# Altium PCB PCB_Raspi_4B.PcbDoc
Units mm, origin at the board's own origin, x right, y up, seen from the top; angles counter-clockwise.
Board outline 37.85 x 84.84 mm, 2 copper layers (Top Layer, Bottom Layer); 19 components, 21 nets, 94 pads, 21 vias.
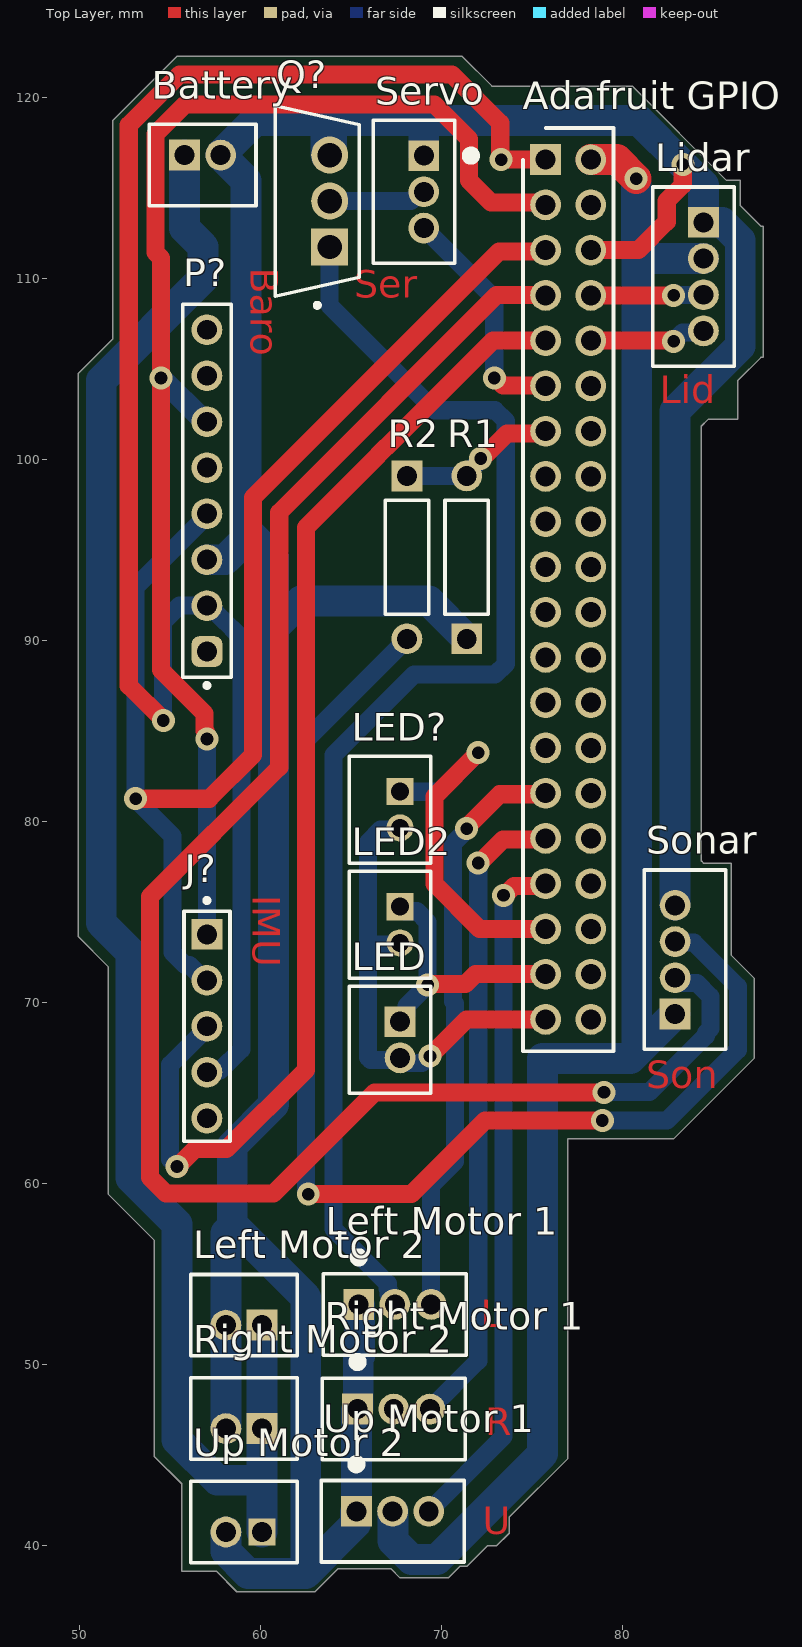
[diagram p0: Top Layer view]
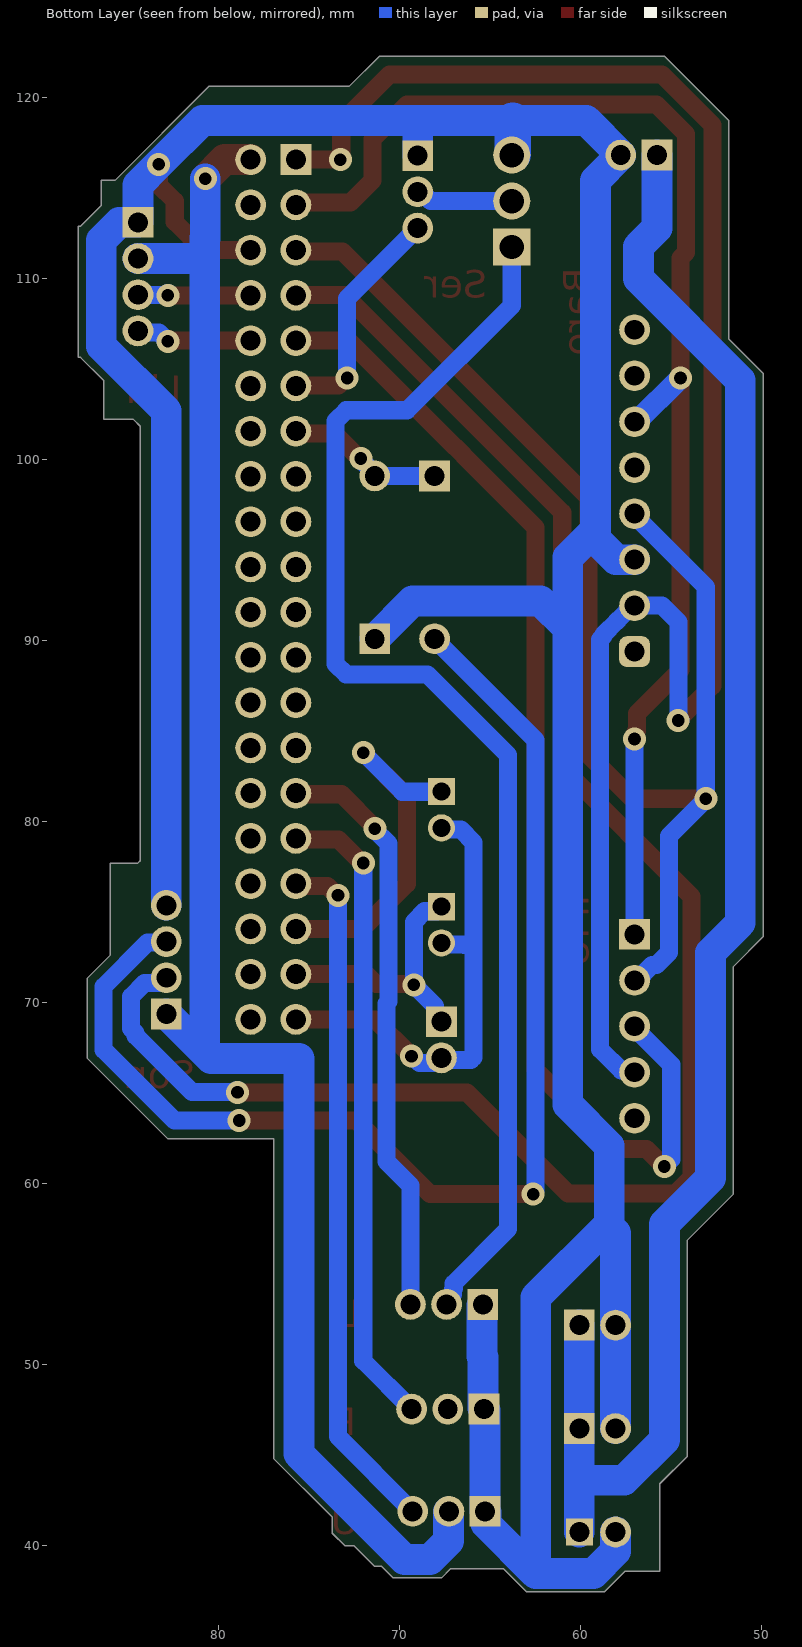
[diagram p1: Bottom Layer view, seen from below]

## Layer stack, top to bottom
Top Solder: solder mask 0.0102, Solder Resist, Dk 3.5
Top Layer: signal copper 0.0356
Dielectric 1: dielectric 0.32, FR-4, Dk 4.8
Bottom Layer: signal copper 0.0356
Bottom Solder: solder mask 0.0102, Solder Resist, Dk 3.5

## Board outline
85.725,115.443 86.487,115.443 86.487,114.046 87.63,112.903 87.757,112.903 87.757,105.664 87.63,105.664 86.36,104.394 86.36,102.235 84.709,102.235 84.328,101.854 84.328,77.851 84.455,77.724 85.979,77.724 85.979,72.644 87.249,71.374 87.249,66.929 82.804,62.484 76.962,62.484 76.962,44.831 73.724,41.593 73.724,40.703 73.025,40.005 72.517,40.005 71.374,38.862 70.993,38.862 70.358,38.227 67.691,38.227 67.183,38.735 64.262,38.735 62.992,37.465 58.674,37.465 57.531,38.608 55.626,38.608 55.626,43.434 54.102,44.958 54.102,56.896 51.562,59.436 51.562,72.009 49.911,73.66 49.911,104.775 51.816,106.68 51.816,118.745 55.372,122.301 71.12,122.301 72.771,120.65 80.518,120.65

## Design rules (kind name [scope] priority, off if disabled: settings)
Clearance [All] p1: gap=0.254 ignorepadtopadclearanceinfootprint=FALSE
PolygonConnect [All] p1: connectstyle=Relief reliefconductorwidth=0.254 reliefentries=4 polygonreliefangle="90 Angle" airgapwidth=0.254
RoutingVias [All] p1: holewidth=0.711 width=1.27 viastyle="Through Hole" minholewidth=0.711 minwidth=1.27 maxholewidth=0.711 maxwidth=1.27
SolderMaskExpansion [All] p1: expansion=0.102 istentingtop=FALSE
Width [All] p1: maxlimit=0.254 minlimit=0.254 preferedwidth=0.254
30 further rules are at their usual default settings.

## Components (designator, comment, footprint, x,y, rotation, side; value= is the part's Value field where it differs from the comment)
"Adafruit GPIO" "1979" RHDR40W60P250_2X20_5100X500X23 75.732,116.588 r270 top
Battery "B2B-PH-K-S(LF)(SN)" JST-B2B-PH-K-S_V#1 56.782,116.29 r0 top
J? "90120-0125" FP-90120-0125-MFG 57.023,68.707 r270 top
LED "B2B-PH-K-S(LF)(SN)" JST-B2B-PH-K-S_V#1 67.141,67.961 r270 top
LED2 "B2B-PH-K-S(LF)(SN)" JST-B2B-PH-K-S_V#2 67.141,74.315 r270 top
LED? "B2B-PH-K-S(LF)(SN)" JST-B2B-PH-K-S_V#2 67.141,80.67 r270 top
"Left Motor 1" "B3B-PH-K-S(LF)(SN)" JST-B3B-PH-K-S-3_V 67.405,52.79 r0 top
"Left Motor 2" "B2B-PH-K-S(LF)(SN)" JST-B2B-PH-K-S_V#1 59.071,52.747 r180 top
Lidar "B4B-PH-K-S(LF)(SN)" JST-B4B-PH-K-S_V 83.905,110.125 r270 top
P? "61300811121" 61300811121 57.023,98.298 r90 top
Q? "IRF530PBF" FP-X15-0364-MFG 63.119,114.3 r180 top
R1 "470" RESA60-630X240 71.374,94.615 r90 top
R2 "330" RESA60-630X240 68.072,94.615 r270 top
"Right Motor 1" "B3B-PH-K-S(LF)(SN)" JST-B3B-PH-K-S-3_V 67.342,47.012 r0 top
"Right Motor 2" "B2B-PH-K-S(LF)(SN)" JST-B2B-PH-K-S_V#1 59.071,47.032 r180 top
Servo "B3B-PH-K-S(LF)(SN)" JST-B3B-PH-K-S-3_V 68.453,114.808 r270 top
Sonar "B4B-PH-K-S(LF)(SN)" JST-B4B-PH-K-S_V 83.439,72.39 r90 top
"Up Motor 1" "B3B-PH-K-S(LF)(SN)" JST-B3B-PH-K-S-3_V 67.278,41.36 r0 top
"Up Motor 2" "B2B-PH-K-S(LF)(SN)" JST-B2B-PH-K-S_V#3 59.071,41.317 r180 top

## Footprints (in the part's own frame and the unit in brackets; to place one, negate y for a bottom-side part, rotate by r counter-clockwise, add the part's x,y. Pads: shape width x height; smd on the part's side, far side on the other; paste and mask are expansions set on the pad)
61300811121 [mm] "Pin Header, pitch 2.54 mm, THT, Vertical, single row, 8p"
  rrect50% 1.7x1.7 hole 1.1: 1(-8.89,0)
  round 1.7 hole 1.1: 2(-6.35,0) 3(-3.81,0) 4(-1.27,0) 5(1.27,0) 6(3.81,0) 7(6.35,0) 8(8.89,0)
  silkscreen extent -10.88,-1.35 10.31,1.35, body extent -10.16,-1.27 10.16,1.27, height 8.57
FP-90120-0125-MFG [mm]
  rect 1.7x1.7 hole 1.1 paste-2539.97 mask+0: 1(-5.08,0)
  round 1.7 hole 1.1 paste-2539.97 mask+0: 2(-2.54,0) 3(0,0) 4(2.54,0) 5(5.08,0)
  silkscreen extent -7.07,-1.27 6.35,1.27, body extent -6.45,-1.37 6.45,1.37, height 0.25
FP-X15-0364-MFG [mm]
  rect 2.05x2.05 hole 1.35 paste-2539.97 mask+0: 1(-0.685,2.54)
  round 2.05 hole 1.35 paste-2539.97 mask+0: 2(-0.685,0) 3(-0.685,-2.54)
  silkscreen extent -2.32,-5.26 2.32,5.88, body extent -2.42,-5.36 2.42,5.36, height 0.25
JST-B2B-PH-K-S_V#1 [mm] "Connector, 2-Leads, Body 5.9x4.5mm, Pitch 2mm"
  rect 1.7x1.7 hole 1.1: 1(-1,0.55)
  round 1.7 hole 1.1: 2(1,0.55)
  silkscreen extent -2.95,-2.25 2.95,2.25, body extent -2.95,-2.25 2.95,2.25, height 6
JST-B2B-PH-K-S_V#2 [mm] "Connector, 2-Leads, Body 5.9x4.5mm, Pitch 2mm"
  rect 1.5x1.5 hole 1: 1(-1,0.55)
  round 1.5 hole 1: 2(1,0.55)
  silkscreen extent -2.95,-2.25 2.95,2.25, body extent -2.95,-2.25 2.95,2.25, height 6
JST-B2B-PH-K-S_V#3 [mm] "Connector, 2-Leads, Body 5.9x4.5mm, Pitch 2mm"
  rect 1.5x1.5 hole 1.1: 1(-1,0.55)
  round 1.7 hole 1.1: 2(1,0.55)
  silkscreen extent -2.95,-2.25 2.95,2.25, body extent -2.95,-2.25 2.95,2.25, height 6
JST-B3B-PH-K-S-3_V [mm] "Connector, 3-Leads, Body 7.9x4.5mm, Pitch 2mm"
  rect 1.7x1.7 hole 1.1: 1(-2,0.55)
  round 1.7 hole 1.1: 2(0,0.55) 3(2,0.55)
  silkscreen extent -3.95,-2.25 3.95,3.4, body extent -3.95,-2.25 3.95,2.25, height 6
JST-B4B-PH-K-S_V [mm] "Connector, 4-Leads, Body 9.9x4.5mm, Pitch 2mm"
  rect 1.7x1.7 hole 1.1: 1(-3,0.55)
  round 1.7 hole 1.1: 2(-1,0.55) 3(1,0.55) 4(3,0.55)
  silkscreen extent -4.95,-2.25 4.95,2.25, body extent -4.95,-2.25 4.95,2.25, height 6
RESA60-630X240 [mm] "Axial Resistor, 2-Leads, Dia 2.4mm, Body Length 6.3mm"
  rect 1.7x1.7 hole 1.1: 1(-4.5,0)
  round 1.7 hole 1.1: 2(4.5,0)
  silkscreen extent -3.15,-1.2 3.15,1.2, body extent -3.15,-1.2 3.15,1.2, height 2.4
RHDR40W60P250_2X20_5100X500X23 [mm]
  rect 1.7x1.7 / inner round 1.7 / far side rect 1.7x1.7 hole 1.1: 1(0,0)
  round 1.7 hole 1.1: 2(0,2.5) 3(2.5,0) 4(2.5,2.5) 5(5,0) 6(5,2.5) 7(7.5,0) 8(7.5,2.5) 9(10,0) 10(10,2.5) 11(12.5,0) 12(12.5,2.5) 13(15,0) 14(15,2.5) 15(17.5,0) 16(17.5,2.5) 17(20,0) 18(20,2.5) 19(22.5,0) 20(22.5,2.5) 21(25,0) 22(25,2.5) 23(27.5,0) 24(27.5,2.5) 25(30,0) 26(30,2.5) 27(32.5,0) 28(32.5,2.5) 29(35,0) 30(35,2.5) 31(37.5,0) 32(37.5,2.5) 33(40,0) 34(40,2.5) 35(42.5,0) 36(42.5,2.5) 37(45,0) 38(45,2.5) 39(47.5,0) 40(47.5,2.5)
  silkscreen extent -1.75,-1.25 49.25,3.75

## Part data
"Adafruit GPIO": library part CMP-002-00071-1, "Stacking Header for Pi A+/B+/Pi 2/Pi 3 - 2x20 Extra Tall Header", Case/Package=None, Check_prices=https://www.snapeda.com/parts/1979/Adafruit+Industries+LLC/view-part/?ref=eda, Component Type=Standard, Design Item ID=1979, MF="Adafruit Industries", MP=1979, Pins=40, SnapEDA_Link=https://www.snapeda.com/parts/1979/Adafruit+Industries+LLC/view-part/?ref=snap, Source=1979.SchLib
Battery LED LED2 LED? "Left Motor 2" "Right Motor 2" "Up Motor 2": library part CMP-2000-05162-1, "Male Header, Pitch 2 mm, 1 x 2 Position, Height 6 mm, Tail Length 3.4 mm, -25 to 85 degC, RoHS, Bulk", Manufacturer=JST, Datasheet URL=http://datasheet.octopart.com/B2B-PH-K-S%28LF%29%28SN%29-JST-datasheet-8324864.pdf, Datasheet Version=Nov-08, Manufacturer URL=http://www.jst.com/home2.html, No of Positions=2, Pitch=2mm, Style/Orientation=StraightHeader/Plug, Termination=Crimp, Type=ShroudedHeader
J?: library part CMP-00257-00655425-1, "90120-0125 2.54mm Pitch C-Grid III Header, Single Row, Vertical, 5 Circuits, Tin (Sn) Plating", Contact Resistance=20mΩ, Current Rating=3A, Housing Color=Black, Manufacturer Lifecycle Status=ACTIVE, Max Operating Temperature=125°C, Max Voltage Rating (DC)=350.35kV, Min Operating Temperature=-55°C, Voltage Rating=350V, Contact Gender=Male, Contact Material=Brass, Contact Plating=Tin, Country of Origin=SK, Gender=Male, Glow Wire Compliant=Non-compliant, Housing Material=Polyester, Lead Free="Lead Free", Lead Length=2.9mm, Lead Pitch=2.54mm, Lifecycle Status=Production, Mating Post Length=6.75mm, Mount="Through Hole", NexarPartId=655425, Number of Circuits=5, Number of Contacts=5, Number of Pins=5, Number of Positions=5, Number of Rows=1, Orientation=Vertical, Packaging=Bulk, Pitch=2.54mm, Plating=Tin, Radiation Hardening=No, REACH SVHC="No SVHC", RoHS=Compliant, Schedule B=8536694040, Termination=Solder, Voltage Rating (AC)=350V
"Left Motor 1" "Right Motor 1" Servo "Up Motor 1": library part CMP-2000-05164-1, "Male Header, Pitch 2 mm, 1 x 3 Position, Height 6 mm, Tail Length 3.4 mm, -25 to 85 degC, RoHS, Bulk", Manufacturer=JST, Datasheet URL=https://datasheet.ciiva.com/11746/0900766b80826550-11746939.pdf, Datasheet Version=Oct-06, Manufacturer URL=http://www.jst.com/home2.html, No of Positions=3, Pitch=2mm, Style/Orientation=StraightHeader/Plug, Termination=Crimp, Type=ShroudedHeader
Lidar Sonar: library part CMP-2000-05165-1, "Male Header, Pitch 2 mm, 1 x 4 Position, Height 6 mm, Tail Length 3.4 mm, -25 to 85 degC, RoHS, Bulk", Manufacturer=JST, Datasheet URL=http://datasheet.octopart.com/B4B-PH-K-S%28LF%29%28SN%29-JST-datasheet-10558886.pdf, Datasheet Version=Apr-09, Manufacturer URL=http://www.jst.com/home2.html, No of Positions=4, Pitch=2mm, Style/Orientation=StraightHeader/Plug, Termination=Crimp, Type=ShroudedHeader
P?: library part CMP-1502-01076-3, Color=Black, Contact Resistance=20mΩ, Current Rating=3A, Max Operating Temperature=105°C, Min Operating Temperature=-40°C, Operating Supply Voltage=250V, Connector Type="Male Pin", Contact Material=Copper, Contact Mating Length=5.9944mm, Contact Plating=Gold, Gender=Male, Height=8.54mm, Lead Pitch=2.54mm, Mount="Through Hole", NexarPartId=32855533, Number of Contacts=8, Number of Pins=8, Number of Positions=8, Number of Rows=1, Orientation=Vertical, Packaging=Bulk, Pitch=2.54mm, REACH SVHC=Unknown, RoHS=Compliant, Termination=Solder, Voltage Rating=250V
Q?: library part CMP-02550-000190-1, "MOSFET N-CH 100V 14A TO-220AB", Continuous Drain Current=14A, Drain To Source Breakdown Voltage=100V, Drain To Source Resistance=0.16Ω, Gate To Source Voltage=20V, Input Capacitace At Vds="670pF @ 25V", Manufacturer=Vishay, Max Forward Diode Voltage=2.5V, Max Junction Temp=+175°C, Package=X15-0364, Power Dissipation=88W, Pulse Drain Current=56A, Temperature="-55°C to +175°C", Temperature Range Low=-55°C, Automotive=No, Category=Trans, ComponentLink2Description=Datasheet, ComponentLink2URL=http://www.vishay.com/docs/91019/91019.pdf, Depletion Mode=False, Device Class L1="Discrete Semiconductors", Device Class L2=Transistors, Device Class L3=MOSFETs, Digikey Description="MOSFET N-CH 100V 14A TO-220AB", Drain To Source Voltage=100V, Gate Charge At Vgs="26nC @ 10V", Height=19.89mm, Lead Free=Yes, Manufacturer Part Number=IRF530PBF, Mouser Description="MOSFET N-Chan 100V 14 Amp", Number Of Channels=1, Number Of N Channels=1, Octopart=https://octopart.com/irf530pbf-vishay-46547999, Reverse Recovery Charge=850nC, Reverse Recovery Time=150ns, RoHS=TRUE, Rthja Max=62°C/W, Standoff Height=3.33mm, Temperature Range High=+175°C, Threshold Vgs Max=4V, Threshold Vgs Min=2V, Turn Off Delay Time=23ns, Turn On Delay Time=10ns
R1 R2: library part CMP-1659-00073-1, "Axial Resistor, 100 KOhm, +/- 1%, 0.25 W, -55 to 155 degC, 2-Pin THD, RoHS, Bulk", Case\Package=Axial, Max Operating Temperature="155 degC", Min Operating Temperature="-55 degC", Package Quantity=200, Power Rating="250 mW", Resistance="475 Ohm", Tolerance=1%, Voltage Rating="250 V", ComponentLink1Description="Manufacturer URL", ComponentLink1URL=http://www.yageo.com/, ComponentLink2Description=Datasheet, ComponentLink2URL=http://www.yageo.com/documents/recent/Yageo%20LR_MFR_2013.pdf, DatasheetVersion=Apr-13, Length="0.248 inch", Mount="Through Hole", PackageDescription="2-Pin Axial Lead, Dia 2.4 mm, Body Length 6.3 mm", PackageReference=MFR-25, Packaging=Bulk, RoHSCompliant=true

## Via types
v1: diameter 1.27, hole 0.7, Top Layer to Bottom Layer, 20 vias
v2: diameter 1.27, hole 0.711, Top Layer to Bottom Layer, 1 vias

## Nets (pads, with @x,y where several pads share a name; then routed paths per layer and width w, separated by ;. In a path a pad name is that pad's centre, name@x,y a point inside that pad or via, vN(x,y) a via of type N, cw(c..) or ccw(c..) an arc to the next point about the centre after c; other vN are vias at no path point)
"NetAdafruit GPIO_1": "Adafruit GPIO.1" J?.4 P?.2 | length 97.1
  Top Layer w1: v1@54.61,85.617 52.705,87.522 52.705,118.491 55.499,121.285 70.561,121.285 73.227,118.618 73.227,116.638 v1(73.279,116.586) 75.732,116.586
  Top Layer w1.2: v1(54.61,85.598) v1@54.61,85.617
  Bottom Layer w1: v1@54.597,85.611 54.597,88.03 54.588,88.039 54.588,91.037 55.499,91.948 P?.2 ; J?.4 57.119,66.263 57.754,66.263 58.928,67.437 58.928,90.076 58.727,90.277 58.727,90.363 57.978,91.112 57.976,91.112 P?.2@57.14,91.948 ; v1@73.227,116.534 v1(73.279,116.586)
  Bottom Layer w1.2: v1@54.597,85.611 v1(54.61,85.598) ; P?.2 P?.2@57.14,91.948
"NetAdafruit GPIO_2": "Adafruit GPIO.2" "Up Motor 1.2" Lidar.2 Sonar.1 | length 98.4
  Top Layer w1.7: 78.232,116.588 79.683,116.588 v1(80.736,115.534)
  Bottom Layer w0.254: 80.428,111.924 80.772,112.268 ; 80.772,111.252 80.899,111.125
  Bottom Layer w1.2: 67.278,41.91 67.297,41.891
  Bottom Layer w1.7: 67.297,41.891 67.297,40.272 68.32,39.249 69.729,39.249 75.565,45.085 75.565,66.929 80.428,66.929 Sonar.1 ; 80.736,112.232 v1(80.736,115.534) ; 80.772,67.273 80.772,111.252 80.772,112.268 ; 80.899,111.125 Lidar.2
"NetAdafruit GPIO_3": "Adafruit GPIO.3" J?.1 P?.6 | length 74.7
  Top Layer w1: v1(57.023,84.582) 56.971,84.634 56.971,84.961 56.896,85.036 56.896,85.979 54.483,88.392 v1(54.483,104.521) 54.483,111.146 54.178,111.451 54.178,118.002 55.809,119.634 69.596,119.634 71.501,117.729 71.501,115.443 72.722,114.222 75.61,114.222 75.66,114.172
  Bottom Layer w1: J?.1 v1(57.023,84.582)
  Bottom Layer w1.2: v1(54.483,104.521) 54.502,104.521 56.915,102.108 P?.6
"NetAdafruit GPIO_5": "Adafruit GPIO.5" J?.2 P?.4 | length 72.8
  Top Layer w1: v1(53.086,81.28) 57.15,81.28 59.563,83.693 59.563,97.912 73.155,111.504 75.636,111.504
  Top Layer w1.2: J?.2@56.956,71.314 J?.2
  Bottom Layer w1: J?.2@56.888,71.247 56.052,72.083 55.819,72.083 55.118,72.784 55.118,79.229 53.086,81.261 53.086,92.983 P?.4@57.023,96.92
  Bottom Layer w1.2: J?.2@56.888,71.247 J?.2 ; P?.4@57.023,96.92 P?.4
"NetAdafruit GPIO_6": "Adafruit GPIO.6" "Left Motor 1.1" "Left Motor 2.2" "Right Motor 1.1" "Right Motor 2.2" "Up Motor 1.1" "Up Motor 2.2" Battery.2 Lidar.1 P?.3 Q?.3 R1.1 Servo.1 Sonar.4 | length 215
  Top Layer w1: 78.232,111.588 80.854,111.588 82.423,113.157 82.423,114.302 83.31,115.189 v1@83.31,116.33
  Bottom Layer w0.254: Q?.3@63.754,116.89 Q?.3
  Bottom Layer w1.2: 65.228,41.86 65.278,41.91 ; 65.278,47.498 65.341,47.561 ; 82.889,78.063 83.058,78.232
  Bottom Layer w1.7: P?.3 58.039,94.488 59.436,95.885 60.706,94.615 60.706,90.697 ; 58.071,40.767 58.071,39.706 59.296,38.481 62.484,38.481 ; 58.071,46.482 58.071,52.197 58.071,57.284 ; 58.42,57.284 58.42,62.103 60.706,64.389 60.706,90.697 ; 58.42,57.785 62.484,53.721 62.484,38.481 ; 59.182,95.631 59.182,115.44 Battery.2 59.687,118.745 63.754,118.745 69.003,118.745 ; 65.228,41.86 65.228,41.225 62.484,38.481 ; 65.278,41.91 65.278,47.498 ; 65.341,47.561 65.388,47.608 65.388,50.419 65.451,50.483 65.451,53.294 65.405,53.34 ; Servo.1 69.003,118.745 ; R1.1 69.287,92.202 62.211,92.202 60.706,90.697 ; Sonar.4 82.889,78.063 82.889,102.701 86.487,106.299 86.487,112.129 85.491,113.125 Lidar.1 84.455,115.189 v1(83.312,116.332) 80.899,118.745 69.003,118.745
  Bottom Layer w2: Q?.3@63.754,116.89 63.754,118.745
"NetAdafruit GPIO_7": "Adafruit GPIO.7" Sonar.2 | length 98.7
  Top Layer w1: 75.732,109.1 73.032,109.1 61.017,97.085 61.017,83.017 53.883,75.883 53.883,60.343 54.755,59.471 60.69,59.471 66.278,65.059 v1(78.959,65.059)
  Bottom Layer w1: v1@78.972,65.072 81.479,65.072 84.593,68.186 84.593,68.337 84.847,68.591 84.847,70.34 84.093,71.094 83.32,71.094 Sonar.2@83.024,71.39
  Bottom Layer w1.2: v1(78.959,65.059) v1@78.972,65.072 ; Sonar.2 Sonar.2@83.024,71.39
"NetAdafruit GPIO_8": "Adafruit GPIO.8" Lidar.3 | length 6.2
  Top Layer w1: 78.242,109.09 v1@82.801,109.09
  Top Layer w1.2: v1@82.801,109.09 v1(82.804,109.093)
  Bottom Layer w1: v1@82.817,109.106 Lidar.3@84.484,109.106
  Bottom Layer w1.2: v1(82.804,109.093) v1@82.817,109.106
"NetAdafruit GPIO_9": "Adafruit GPIO.9" J?.3 | length 65.6
  Top Layer w1: v1@55.391,60.96 56.354,61.923 58.113,61.923 62.484,66.294 62.484,96.266 66.468,100.25 66.468,100.277 66.91,100.719 66.937,100.719 72.818,106.6 75.732,106.6
  Top Layer w1.2: v1(55.372,60.96) v1@55.391,60.96
  Bottom Layer w1: v1@55.372,60.979 54.991,61.36 54.991,66.58 J?.3@57.023,68.612
  Bottom Layer w1.2: v1(55.372,60.96) v1@55.372,60.979 ; J?.3@57.023,68.612 J?.3
"NetAdafruit GPIO_10": "Adafruit GPIO.10" Lidar.4 | length 6.5
  Top Layer w1: 78.244,106.588 v1@82.75,106.588
  Top Layer w1.2: v1@82.75,106.588 82.785,106.553 v1(82.804,106.553)
  Bottom Layer w1: v1@82.823,106.553 83.299,107.029 Lidar.4@84.385,107.029
  Bottom Layer w1.2: v1(82.804,106.553) v1@82.823,106.553 ; Lidar.4@84.385,107.029 Lidar.4@84.481,107.125
"NetAdafruit GPIO_11": "Adafruit GPIO.11" Servo.3 | length 12.9
  Top Layer w1: v1(72.898,104.521) 72.971,104.521 73.382,104.11 75.578,104.11 75.66,104.028
  Bottom Layer w1: Servo.3 72.898,108.913 v1(72.898,104.521)
"NetAdafruit GPIO_13": "Adafruit GPIO.13" R1.2 R2.1 | length 8.8
  Top Layer w1: v1(72.144,100.074) 72.217,100.074 73.597,101.454 75.586,101.454 75.72,101.588
  Bottom Layer w1: R2.1 R1.2 ; R1.2@71.374,99.156 71.374,99.231 72.144,100.001 v1(72.144,100.074)
  Bottom Layer w1.2: R1.2 R1.2@71.374,99.156
"NetAdafruit GPIO_29": "Adafruit GPIO.29" "Left Motor 1.3" | length 32.3
  Top Layer w1: v1(71.374,79.629) 71.374,79.701 73.201,81.528 75.66,81.528
  Bottom Layer w1: 69.405,53.34 69.405,59.917 70.731,61.243 70.731,69.967 70.62,70.078 70.62,78.802 71.374,79.556 v1(71.374,79.629)
"NetAdafruit GPIO_31": "Adafruit GPIO.31" "Right Motor 1.3" | length 35.6
  Top Layer w1: v1(72.009,77.724) 72.082,77.724 73.382,79.024 75.668,79.024 75.732,79.088
  Bottom Layer w1: 69.342,47.561 72.009,50.229 v1(72.009,77.724)
"NetAdafruit GPIO_33": "Adafruit GPIO.33" "Up Motor 1.3" | length 38.3
  Top Layer w1: v1(73.406,75.946) 73.479,75.946 73.987,76.454 75.598,76.454 75.732,76.588
  Bottom Layer w1: 69.278,41.91 73.406,46.038 v1(73.406,75.946)
"NetAdafruit GPIO_35": "Adafruit GPIO.35" LED?.1 | length 20.7
  Top Layer w1: v2(72.009,83.82) 69.596,81.407 69.596,76.581 72.089,74.088 75.732,74.088
  Bottom Layer w0.254: LED?.1 LED?.1@67.763,81.597
  Bottom Layer w1: LED?.1@67.763,81.597 67.873,81.597 67.941,81.665 69.854,81.665 v2(72.009,83.82)
"NetAdafruit GPIO_37": "Adafruit GPIO.37" LED2.1 LED.1 | length 14.8
  Top Layer w0.254: 75.688,71.545 75.732,71.588
  Top Layer w1: v1(69.215,70.993) 69.267,71.045 71.307,71.045 71.85,71.588 75.409,71.588 75.452,71.545 75.688,71.545
  Bottom Layer w1: LED.1 68.041,69.311 68.041,69.819 v1(69.215,70.993) 69.215,74.479 68.629,75.065 67.941,75.065 LED2.1
"NetAdafruit GPIO_39": "Adafruit GPIO.39" LED2.2 LED.2 LED?.2 | length 26.9
  Top Layer w1: v1(69.342,67.056) 71.374,69.088 75.732,69.088
  Bottom Layer w0.254: 65.913,66.983 66.062,66.834 ; 65.913,73.345 66.062,73.196
  Bottom Layer w1: 65.913,66.983 65.913,73.345 65.913,78.867 66.62,79.574 67.595,79.574 LED?.2 ; 66.062,66.834 LED.2@67.691,66.834 ; 66.062,73.196 66.432,73.196 66.456,73.22 67.595,73.22 LED2.2 ; LED.2 67.88,66.961 68.155,66.687 68.9,66.687 69.269,67.056 v1(69.342,67.056)
NetBattery_1: "Left Motor 2.1" "Right Motor 2.1" "Up Motor 2.1" Battery.1 | length 92.5
  Bottom Layer w1.7: Battery.1 55.782,112.8 56.801,111.781 56.801,110.014 51.181,104.394 51.181,74.422 52.832,72.771 52.832,60.325 55.372,57.785 55.372,45.847 57.594,43.624 60.071,43.624 ; 60.071,40.767 60.071,43.624 ; 60.071,52.197 60.071,46.482 60.071,43.624
"NetLeft Motor 1_2": "Left Motor 1.2" Q?.1 | length 72.6
  Bottom Layer w0.254: 69.364,102.721 69.574,102.721 69.596,102.743
  Bottom Layer w1: Q?.1 63.804,108.535 69.596,102.743 72.947,102.743 73.533,102.157 73.533,88.724 72.947,88.138 68.453,88.138 64.008,83.693 64.008,57.503 67.009,54.502 67.009,54.231 67.055,54.185 67.055,53.879 67.405,53.529 67.405,53.34
NetQ?_2: Q?.2 Servo.2 | length 5.4
  Bottom Layer w1: Q?.2 68.306,114.3 68.814,114.808 Servo.2
NetR2_2: R2.2 Sonar.3 | length 68.1
  Top Layer w1: v1(62.619,59.436) 68.326,59.436 72.39,63.5 v1(78.867,63.5)
  Bottom Layer w1: v1(62.619,59.436) 62.619,59.509 62.484,59.644 62.484,84.527 R2.2 ; v1(78.867,63.5) 82.447,63.5 86.36,67.413 86.36,70.89 83.918,73.333 Sonar.3@82.946,73.333
  Bottom Layer w1.2: Sonar.3 Sonar.3@82.946,73.333
pads on no net: "Adafruit GPIO.4" "Adafruit GPIO.12" "Adafruit GPIO.14" "Adafruit GPIO.15" "Adafruit GPIO.16" "Adafruit GPIO.17" "Adafruit GPIO.18" "Adafruit GPIO.19" "Adafruit GPIO.20" "Adafruit GPIO.21" "Adafruit GPIO.22" "Adafruit GPIO.23" "Adafruit GPIO.24" "Adafruit GPIO.25" "Adafruit GPIO.26" "Adafruit GPIO.27" "Adafruit GPIO.28" "Adafruit GPIO.30" "Adafruit GPIO.32" "Adafruit GPIO.34" "Adafruit GPIO.36" "Adafruit GPIO.38" "Adafruit GPIO.40" "Right Motor 1.2" J?.5 P?.1 P?.5 P?.7 P?.8

## Other copper
Top Layer:
  text "Baro" at 59.436,110.617 h1.52 r270
  text "Ser" at 65.151,108.966 h1.52
  text "Lid" at 82.042,103.124 h1.52
  text "IMU" at 59.563,75.946 h1.52 r270
  text "Son" at 81.28,65.278 h1.52
  text "L" at 72.136,52.07 h1.52
  text "R" at 72.39,46.101 h1.52
  text "U" at 72.263,40.64 h1.52